# Altium PCB HASEL_Pair_One_Polarity.PcbDoc
Units mil, origin at the board's own origin, x right, y up, seen from the top; angles counter-clockwise.
Board outline 5465 x 4165 mil, 2 copper layers (Top Layer, Bottom Layer); 54 components, 51 nets, 216 pads, 42 vias.
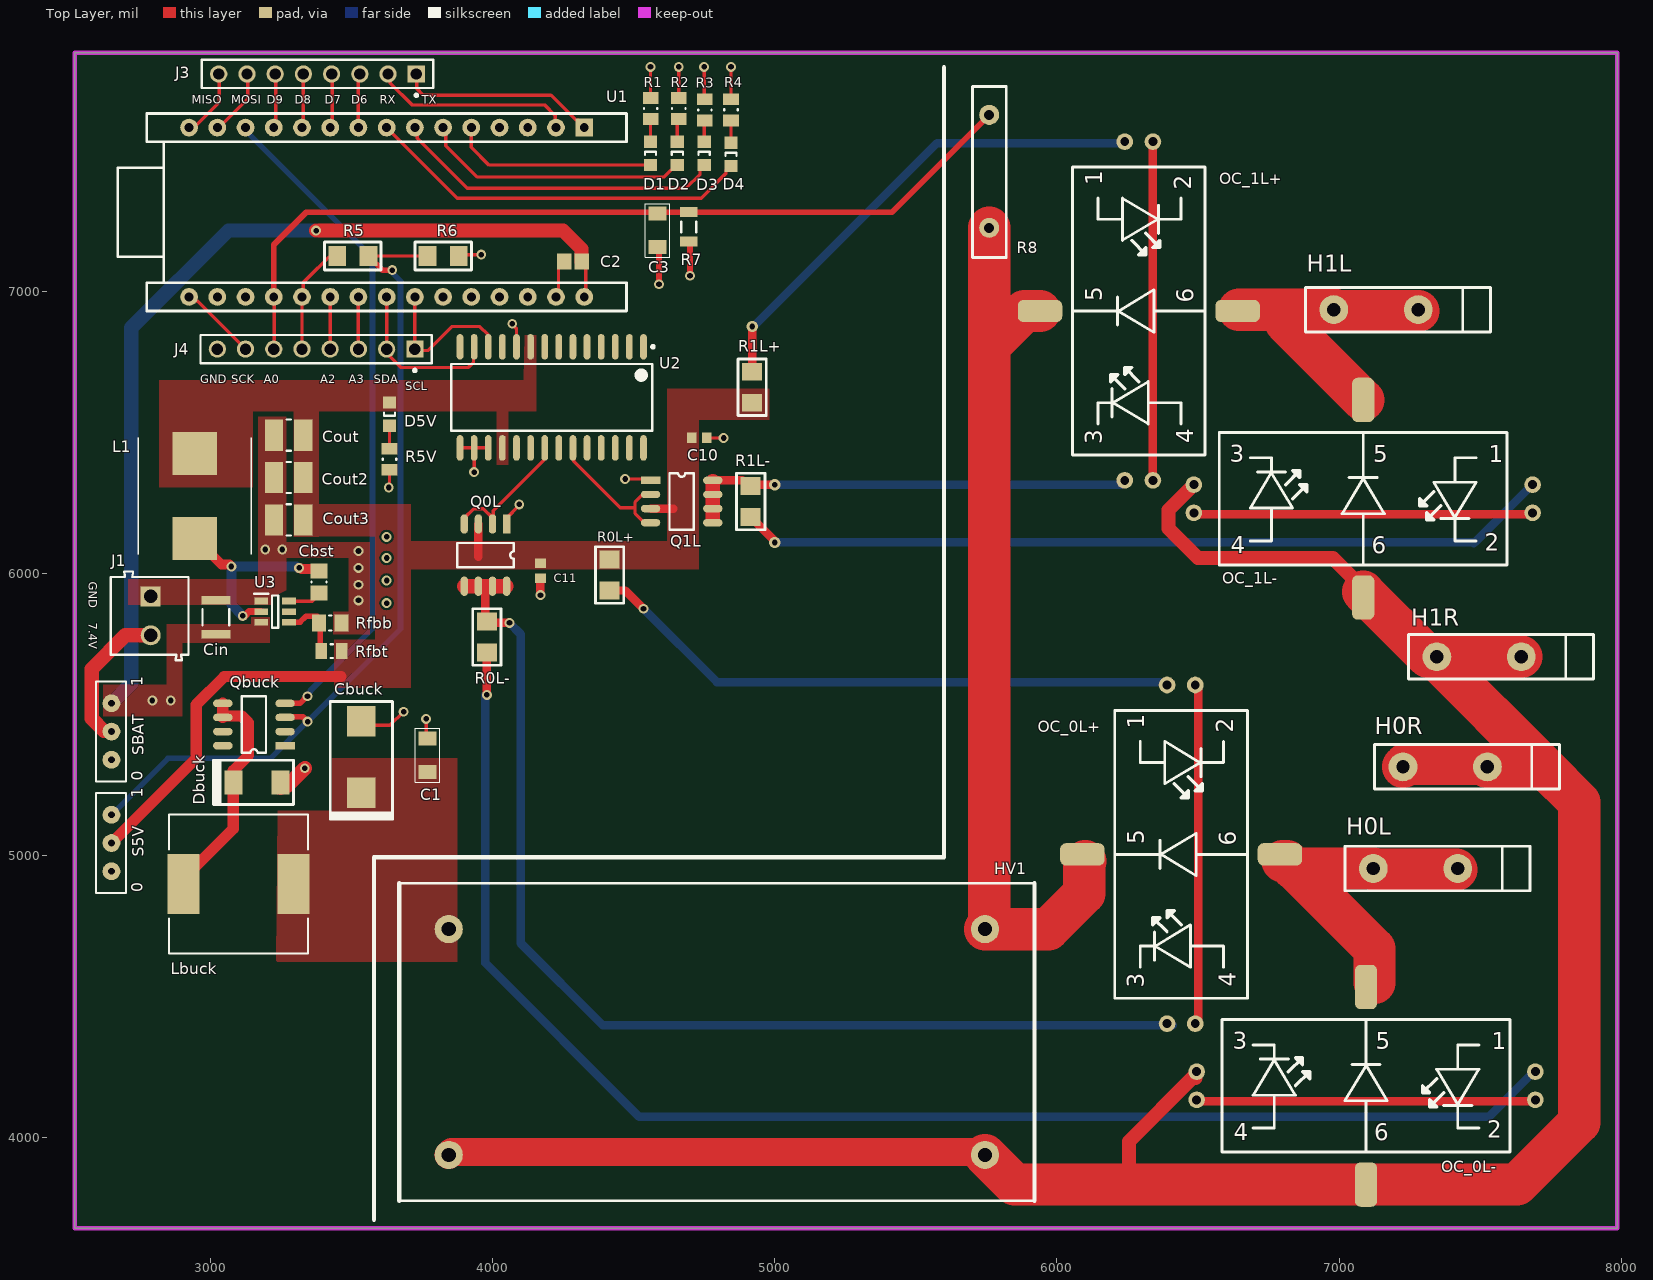
[diagram p0: Top Layer view]
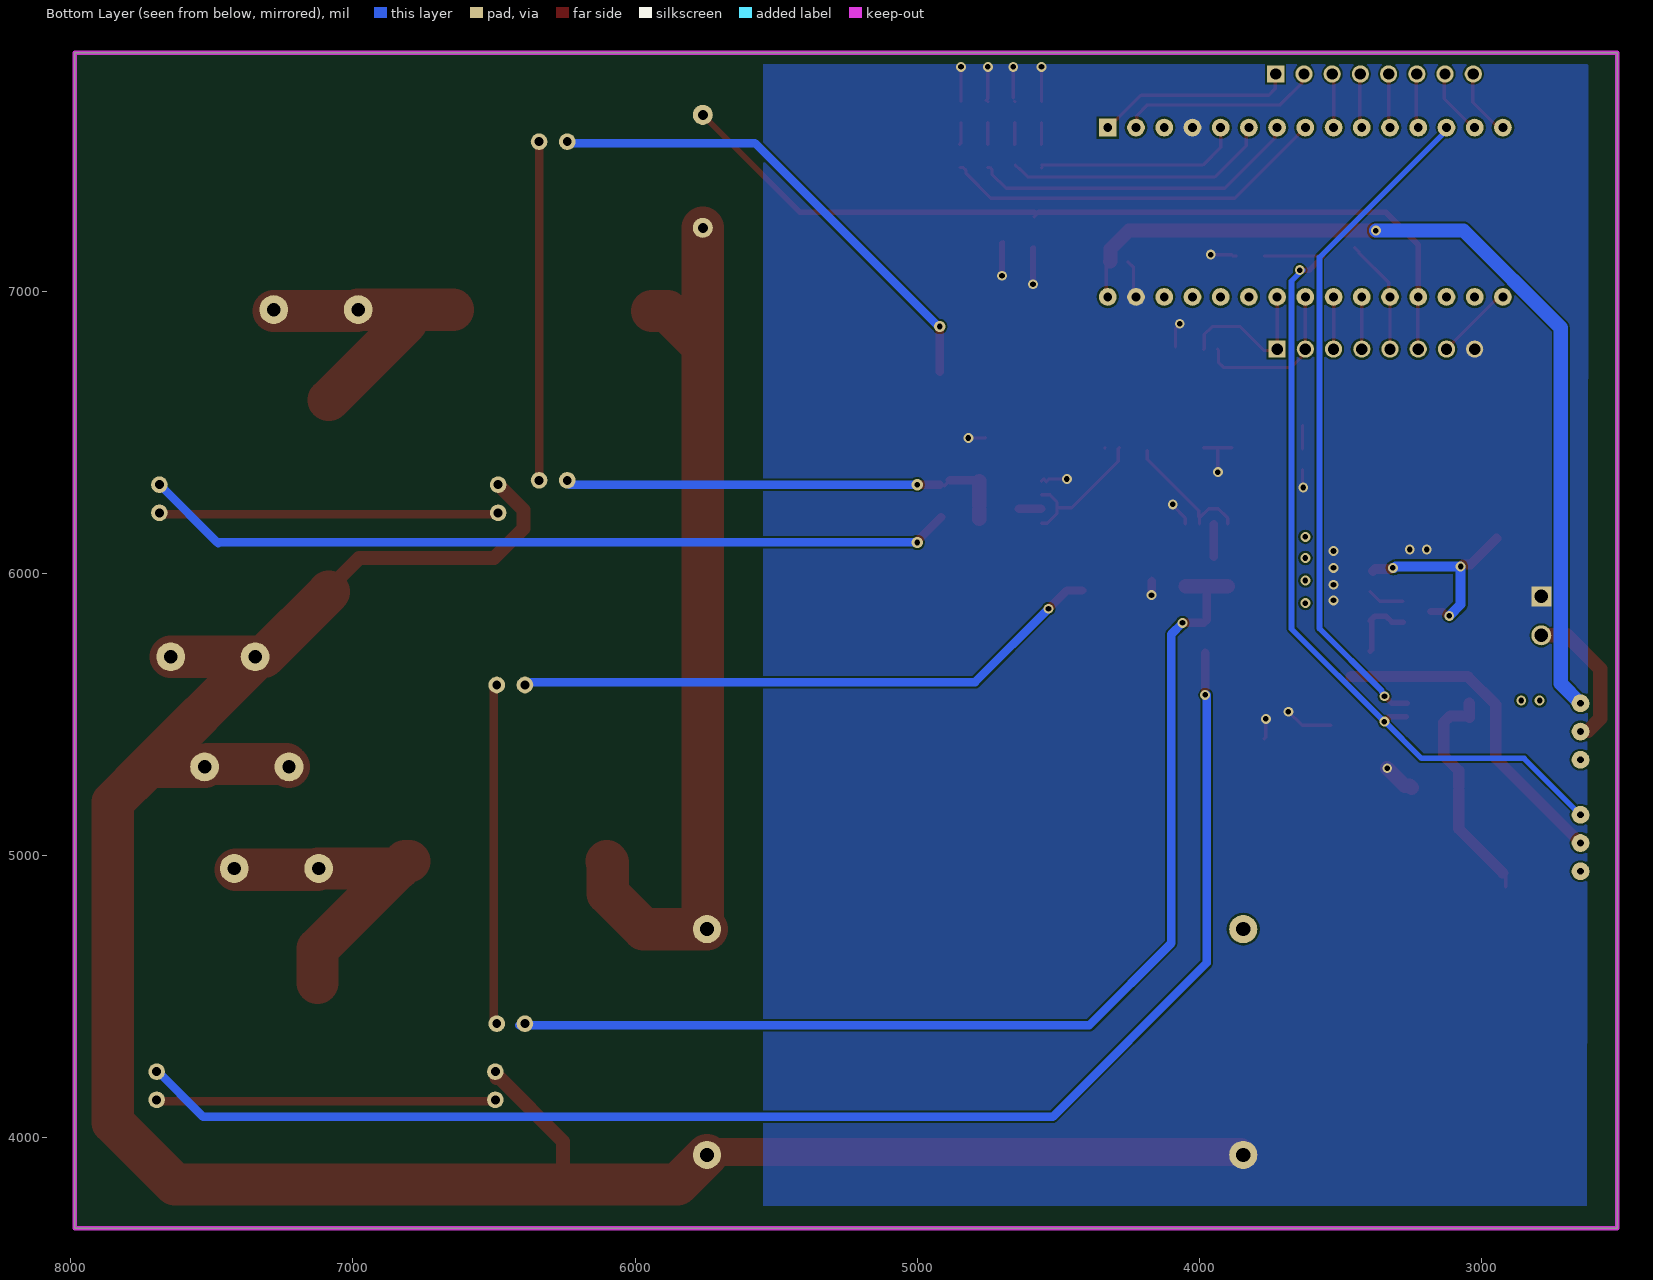
[diagram p1: Bottom Layer view, seen from below]

## Layer stack, top to bottom
Top Solder: solder mask 0.4, Solder Resist, Dk 3.5
Top Layer: signal copper 1.4
Dielectric 1: dielectric 12.6, FR-4, Dk 4.8
Bottom Layer: signal copper 1.4
Bottom Solder: solder mask 0.4, Solder Resist, Dk 3.5

## Board outline
2520,3680 7985,3680 7985,7845 2520,7845

## Design rules (kind name [scope] priority, off if disabled: settings)
Clearance [All] p1: gap=7.5 ignorepadtopadclearanceinfootprint=TRUE
PolygonConnect [All] p1: connectstyle=Direct reliefconductorwidth=10 reliefentries=4 polygonreliefangle="90 Angle" airgapwidth=10
RoutingVias [All] p1: holewidth=28 width=50 viastyle="Through Hole" minholewidth=15 minwidth=25 maxholewidth=28 maxwidth=50
SilkToSilkClearance [All] p1: silktosilkclearance=7
SilkToSolderMaskClearance [IsPad] p1: minsilkscreentomaskgap=6 clearancetoexposedcopper=TRUE
SolderMaskExpansion [All] p1: expansion=4 istentingtop=FALSE
Width [All] p1: maxlimit=200 minlimit=10 preferedwidth=12 minimp=50.000000 maximp=50.000000 favimp=50.000000
28 further rules are at their usual default settings.

## Classes and differential pairs
component class Control: C1 C2 Cbst Cbuck Cin Cout Cout2 Cout3 D1 D2 D3 D4 D5V Dbuck HV1 J1 J3 J4 L1 Lbuck Qbuck R1 R2 R3 R4 R5 R5V R6 Rfbb Rfbt S5V SBAT U1 U2 U3
component class Hbridge0: C3 C10 C11 H0L H0R H1L H1R OC_0L+ OC_0L- OC_1L+ OC_1L- Q0L Q1L R0L+ R0L- R1L+ R1L- R7 R8

## Components (designator, comment, footprint, x,y, rotation, side; value= is the part's Value field where it differs from the comment)
C1 "Capacitor 10uF" "1206 CAP" 3770,5355.94 r270 top value=10uF
C2 "C0805C104K5RACTU" CAPC2013X88X50NL20T25 4285,7105 r0 top
C3 "Capacitor 0.33uF" "1206 CAP" 4585,7215.94 r90 top value=0.33uF
C10 "GRM1885C1H101JA01D" CAPC1608X90X35NL10T15 4732.5,6480.93 r180 top
C11 "GRM1885C1H101JA01D" CAPC1608X90X35NL10T15 4170,6010 r90 top
Cbst "CAP 100nF 50V 0805(2012)" CAPC0805(2012)100_M 3385,5970 r90 top value=100nF
Cbuck "Capacitor 220uF (Polarized)" "SMD 7343 - Pol" 3535,5350 r270 top value=220uF
Cin "GRM32ER61C226KE20L" MURA-1210_H_2.7_L 3020,5845 r270 top
Cout "CL32B106KBJNNWE" FP-CL32-IPC_B 3277.82,6490 r180 top
Cout2 "CL32B106KBJNNWE" FP-CL32-IPC_B 3277.82,6340 r180 top
Cout3 "CL32B106KBJNNWE" FP-CL32-IPC_B 3277.82,6190 r180 top
D1 "150080SS75000" 0805_A 4560,7488.66 r270 top
D2 "150080VS75000" 0805_A 4655,7488.66 r270 top
D3 "150080SS75000" 0805_A 4750,7488.66 r270 top
D4 "150080VS75000" 0805_A 4845,7485 r270 top
D5V "150080VS75000" 0805_A 3635,6565 r90 top
Dbuck "Schottky Diode" "Schottky Diode" 3165,5260 r180 top
H0L "HV Socket" "HV Socket 2mm" 7420,4955 r180 top
H0R "HV Socket" "HV Socket 2mm" 7525,5315 r180 top
H1L "HV Socket" "HV Socket 2mm" 7280,6935 r180 top
H1R "HV Socket" "HV Socket 2mm" 7645,5705 r180 top
HV1 "5VV9 (5W)" 5VV9 3670,3777.5 r0 top
J1 "PWR Terminal Block" 691103110002 2785,5850 r270 top
J3 "PPPC081LFBN-RC" SLIN-PPPC081LFBN-RC_V 3380,7770 r180 top
J4 "PPPC081LFBN-RC" SLIN-PPPC081LFBN-RC_V 3375,6795 r180 top
L1 "7443251600" WE-HCI_105023 2945,6275 r90 top
Lbuck "7447709821" WE-PD-XXL 3100,4900 r0 top
OC_0L+ "OC100HG" OC100G 6440,5005 r180 top
OC_0L- "OC100HG" OC100G 7095,4185 r90 top
OC_1L+ "OC100HG" OC100G 6290,6930 r180 top
OC_1L- "OC100HG" OC100G 7085,6265 r90 top
Q0L "Dual MOSFET" SO-8 4050,6175.47 r270 top
Q1L "Dual MOSFET" SO-8 4560,6330 r0 top
Qbuck "Dual MOSFET" SO-8 3265,5390 r180 top
R0L+ "Resistor" "1206 R" 4415,5939.76 r0 top value=27R
R0L- "Resistor" "1206 R" 3980,5830 r180 top value=27R
R1 "ERJ-6GEYJ161V" RESC0805(2012)_N 4560,7647.6 r270 top value="160.00 Ohm"
R1L+ "Resistor" "1206 R" 4920,6715 r180 top value=27R
R1L- "Resistor" "1206 R" 4915,6310 r180 top value=27R
R2 "ERJ-6GEYJ161V" RESC0805(2012)_N 4660,7647.6 r270 top value="160.00 Ohm"
R3 "ERJ-6GEYJ161V" RESC0805(2012)_N 4752.5,7642.5 r270 top value="160.00 Ohm"
R4 "ERJ-6GEYJ161V" RESC0805(2012)_N 4845,7642.6 r270 top value="160.00 Ohm"
R5 "Resistor" "1206 R" 3560.24,7125 r90 top value=1k
R5V "ERJ-6GEYJ161V" RESC0805(2012)_N 3635,6405 r90 top value="160.00 Ohm"
R6 "Resistor" "1206 R" 3880.24,7125 r90 top value=1k
R7 "ERJ-8ENF8062V" RESC3216X70X50LL05T20 4695,7227.83 r90 top
R8 "Resistor" "HV resistor" 5760,7625 r270 top value=100M
Rfbb "CRCW080513K7FKEA" RESC2013X50X30ML20T20 3425,5825 r180 top
Rfbt "CRCW0805100KFKEA" RESC2013X50X30NL20T20 3430,5725 r0 top
S5V "Slider Switch" "Slide Switch" 2650,5045 r180 top
SBAT "Slider Switch" "Slide Switch" 2650,5440 r180 top
U1 "Arduino Nano" "Arduino Nano" 4125,7580 r270 top
U2 "MCP23017-E/SO" SOIC-SO28_N 4210,6624.13 r270 top
U3 "TPS54308DDCR" SOT95P280X100-6N 3230,5865 r0 top

## Footprints (in the part's own frame and the unit in brackets; to place one, negate y for a bottom-side part, rotate by r counter-clockwise, add the part's x,y. Pads: shape width x height; smd on the part's side, far side on the other; paste and mask are expansions set on the pad)
5VV9 [mil]
  round 100 hole 50: 1(175,962.5) 2(175,162.5) 3(2075,962.5) 4(2075,162.5)
  silkscreen extent 0,0 2250,1125
0805_A [mm] "Chip LED, 2-Leads, Body 2.0x1.3mm, IPC Medium Density"
  rect 1.1x1.2 smd: 1(-1.05,0) 2(1.05,0)
  silkscreen extent -0.15,-0.5 0.15,0.5, body extent -1,-0.62 1,0.63, height 0.68
"1206 CAP" [mm]
  rect 1.25x1.6 smd: 1(-1.5,0) 2(1.5,0)
  silkscreen extent -2.41,-1.1 2.41,1.1, body extent -1.55,-0.8 1.55,0.8, height 1.05
"1206 R" [mm]
  rect 1.8x1.6 smd: 1(0,0) 2(0,2.8)
  silkscreen extent -1.27,-1.14 1.27,3.94, body extent -0.8,-0.4 0.8,3.2, height 0.25
691103110002 [mm] "3,50mm - modular - blue - Horizontal wire entry - Pressure clamp - 8,4mm height - 02p"
  rect 1.8x1.8 hole 1.2: 1(-1.75,0.1)
  round 1.8 hole 1.2: 2(1.75,0.1)
  silkscreen extent -4,-3.5 4,3.5, body extent -4,-3.5 4,3.5, height 8.45
"Arduino Nano" [mm]
  rect 1.6x1.6 hole 0.8: 1(0,5.08)
  round 1.6 hole 0.8: 2(0,2.54) 3(0,0) 4(0,-2.54) 5(0,-5.08) 6(0,-7.62) 7(0,-10.16) 8(0,-12.7) 9(0,-15.24) 10(0,-17.78) 11(0,-20.32) 12(0,-22.86) 13(0,-25.4) 14(0,-27.94) 15(0,-30.48) 16(15.24,5.08) 17(15.24,2.54) 18(15.24,0) 19(15.24,-2.54) 20(15.24,-5.08) 21(15.24,-7.62) 22(15.24,-10.16) 23(15.24,-12.7) 24(15.24,-15.24) 25(15.24,-17.78) 26(15.24,-20.32) 27(15.24,-22.86) 28(15.24,-25.4) 29(15.24,-27.94) 30(15.24,-30.48)
  silkscreen extent -1.27,-36.89 16.51,8.89, body extent -1.4,-34.29 16.51,8.89, height 8.26
CAPC0805(2012)100_M [mm] "Chip Capacitor, Body 2.0x1.2mm, Height 1.0mm, IPC Low Density"
  rect 1.35x1.55 smd: 1(-1,0) 2(1,0)
  silkscreen extent -0.05,-0.67 0.05,0.67, body extent -1.1,-0.72 1.1,0.72, height 1
CAPC1608X90X35NL10T15 [mm] "Chip Capacitor, 2-Leads, Body 1.60x0.80mm, IPC Medium Density"
  rect 0.85x0.95 smd: 1(-0.675,0) 2(0.675,0)
  body extent -0.85,-0.45 0.85,0.45, height 0.9
CAPC2013X88X50NL20T25 [mm] "Chip Capacitor, 2-Leads, Body 2.00x1.25mm, IPC Medium Density"
  rect 1.3x1.45 smd: 1(-0.8,0) 2(0.8,0)
  body extent -1.1,-0.72 1.1,0.72, height 0.88
FP-CL32-IPC_B [mil]
  rect 65.06x110.4 smd paste+0 mask+0: 1(-52.18,0) 2(52.17,0)
  silkscreen extent -8,-55 8,55, body extent -95,-65 95,65, height 10
"HV resistor" [mm]
  round 1.8 hole 0.9 mask+0.102: 1(-0.002,0)
  round 1.8 hole 0.9: 2(10.16,0)
  silkscreen extent -2.54,-1.5 12.83,1.52, body extent -2.54,-1.27 12.83,1.27, height 8.64
"HV Socket 2mm" [mm]
  round 2.6 hole 1.2: 1(0,0) 2(7.6,0)
  silkscreen extent -6.5,-2 10.16,2, body extent -6.4,-2 8.5,2.1, height 6
MURA-1210_H_2.7_L [mm] "Chip Capacitor, 2-Leads, Body 3.5x2.7mm, IPC High Density"
  rect 0.75x2.6 smd: 1(-1.525,0) 2(1.525,0)
  silkscreen extent -0.75,-1.2 0.75,1.2, body extent -1.75,-1.35 1.75,1.35, height 2.7
OC100G [mm]
  round 1.5 hole 0.8: 1(1.27,-15.24) 2(-1.27,-15.24) 3(1.27,15.24) 4(-1.27,15.24)
  rrect50% 4x2 smd: 5(8.89,0) 6(-8.89,0)
  silkscreen extent -5.97,-12.95 5.97,12.95, body extent -9.53,-16.51 9.53,16.51, height 8.13
RESC0805(2012)_N [mm] "Chip Resistor, Body 2.0x1.3mm, IPC Medium Density"
  rect 1.05x1.4 smd: 1(-0.95,0) 2(0.95,0)
  silkscreen extent -0.05,-0.6 0.05,0.6, body extent -1.1,-0.67 1.1,0.68, height 0.7
RESC2013X50X30ML20T20 [mm] "Chip Resistor, 2-Leads, Body 2.00x1.25mm, IPC Low Density"
  rect 1.25x1.55 smd: 1(-1.025,0) 2(1.025,0)
  silkscreen extent -0.1,-0.67 0.1,0.67, body extent -1.1,-0.72 1.1,0.72, height 0.5
RESC2013X50X30NL20T20 [mm] "Chip Resistor, 2-Leads, Body 2.00x1.25mm, IPC Medium Density"
  rect 1.05x1.45 smd: 1(-0.925,0) 2(0.925,0)
  silkscreen extent -0.1,-0.63 0.1,0.63, body extent -1.1,-0.72 1.1,0.72, height 0.5
RESC3216X70X50LL05T20 [mm] "Chip Resistor, 2-Leads, Body 3.20x1.60mm, IPC High Density"
  rect 0.9x1.55 smd: 1(-1.325,0) 2(1.325,0)
  silkscreen extent -0.5,-0.67 0.5,0.67, body extent -1.63,-0.82 1.62,0.82, height 0.7
"Schottky Diode" [mm]
  rect 1.62x2.18 smd: 1(-2.11,0) 2(2.11,0)
  silkscreen extent -3.3,-2 3.9,2
"Slide Switch" [mm]
  round 1.6 hole 0.6: 1(0,2.54) 2(0,0) 3(0,-2.54)
  silkscreen extent -1.3,-4.5 1.4,4.5, body extent -1,-4 4.5,4, height 0.25
SLIN-PPPC081LFBN-RC_V [mm] "THD, 8-Leads, Body 20.82x2.54mm, Pitch 2.54mm"
  rect 1.55x1.55 hole 1.02: 1(-8.89,0)
  round 1.55 hole 1.02: 2(-6.35,0) 3(-3.81,0) 4(-1.27,0) 5(1.27,0) 6(3.81,0) 7(6.35,0) 8(8.89,0)
  silkscreen extent -10.41,-1.27 10.41,2.04, body extent -10.41,-1.27 10.41,1.27, height 8.5
"SMD 7343 - Pol" [mm]
  rect 2.77x2.55 smd: 1(3.22,0) 2(-3.22,0)
  silkscreen extent -5,-2.8 5.6,2.8
SO-8 [mm]
  rect 1.75x0.67 smd: 1(0,0)
  oval 1.75x0.67 smd: 2(0,-1.27) 3(0,-2.54) 4(0,-3.81) 5(5.6,-3.81) 6(5.6,-2.54) 7(5.6,-1.27) 8(5.6,0)
  silkscreen extent 1.71,-4.44 3.89,0.64
SOIC-SO28_N [mm] "SOIC, 28-Leads, Body 17.9x7.5mm, Pitch 1.27mm, IPC Medium Density"
  oval 2.3x0.6 smd: 1(-4.55,8.255) 2(-4.55,6.985) 3(-4.55,5.715) 4(-4.55,4.445) 5(-4.55,3.175) 6(-4.55,1.905) 7(-4.55,0.635) 8(-4.55,-0.635) 9(-4.55,-1.905) 10(-4.55,-3.175) 11(-4.55,-4.445) 12(-4.55,-5.715) 13(-4.55,-6.985) 14(-4.55,-8.255) 15(4.55,-8.255) 16(4.55,-6.985) 17(4.55,-5.715) 18(4.55,-4.445) 19(4.55,-3.175) 20(4.55,-1.905) 21(4.55,-0.635) 22(4.55,0.635) 23(4.55,1.905) 24(4.55,3.175) 25(4.55,4.445) 26(4.55,5.715) 27(4.55,6.985) 28(4.55,8.255)
  silkscreen extent -4.67,-9.05 3,9.23, body extent -3.8,-9.05 3.8,9.05, height 2.65
SOT95P280X100-6N [mm]
  rect 1.25x0.6 smd: 1(-1.25,0.95) 2(-1.25,0) 3(-1.25,-0.95) 4(1.25,-0.95) 5(1.25,0) 6(1.25,0.95)
  silkscreen extent -1.88,-1.45 0.28,1.6, body extent -1.4,-1.45 1.4,1.45, height 1
WE-HCI_105023 [mm]
  rect 3.85x4 smd: 1(-3.825,0) 2(3.825,0)
  silkscreen extent -5.25,-5.1 5.25,5.1
WE-PD-XXL [mm] "SMD Inductor, 2-Leads, Body 12.0 x 12.0 mm"
  rect 2.9x5.4 smd: 1(-4.95,0) 2(4.95,0)
  silkscreen extent -6.25,-6.25 6.25,6.25, body extent -6,-6 6,6, height 10.36

## Part data
C1: "1276-3038-6-ND / Manufacturer: CL31A106KAHNFNE"
C2: library part CMP-2007-00279-1, Manufacturer=Kemet, Part Number=C0805C104K5RACTU
C3: "‎399-1285-1-ND‎ Manufacturer: ‎C1206C334K3RACTU‎"
C10 C11: library part CMP-2006-02595-1, Manufacturer=Murata, Part Number=GRM1885C1H101JA01D
Cbst: library part CMP-1036-04423-1, "CAP 100nF 50V ±20% 0805 (2012 Metric) Thickness 1mm SMD", Case-EIA=0805, Case-Metric=2012, Rated Voltage="50 V", Tolerance=Â±20%, Max Thickness="1 mm", Technology=SMT
Cbuck: "Digikey: ‎399-8415-1-ND‎ / Manufacturer: ‎T491X227K016AT‎", LatestRevisionDate=17-Jul-2002, LatestRevisionNote="Re-released for DXP Platform.", PackageDescription="Polarized Capacitor (Radial); 2 Leads", PackageReference=RB7.6-15, Published=8-Jun-2000, Publisher="Altium Limited"
Cin: library part CMP-2000-06361-1, "Chip Monolithic Ceramic Capacitor, 22 uF, +/- 10%, -55 to 85 degC, 2-Pin SMD (1210), RoHS, Tape and Reel", Capacitance=22µF, Manufacturer=Murata, Operating Temperature=-55°C~85°C, Package / Case=1210(3225Metric), Package Description="2-Pin Surface Mount Device, Body 3.2 x 2.5 mm", Package Reference=1210, Ratings=-, Standard Package=1,000, Temperature Coefficient=X5R, Tolerance=±10%, Voltage - Rated=16V, Applications=GeneralPurpose, Catalog Drawings=GRMSeries_1210_2.5, Category=Capacitors, Datasheet URL=https://datasheet.ciiva.com/26915/getdatasheetpartid-88858-26915376.pdf, Datasheet Version=05/2014, Family=CeramicCapacitors, Featured Product=GA3SafetyRecognizedCapsandHi-CapMLCC, Features=-, Height - Seated (Max)=-, Lead Spacing=-, Lead Style=-, Manufacturer URL=http://www.murata.com/, Mounting Technology=SurfaceMount, Mounting Type=SurfaceMount,MLCC, Online Catalog=GRMSeries, Other Names=490-1882-2, Packaging=Tape&Reel(TR), Product Training Modules=High-CapMultilayerCeramicCapacitors, Series=GRM, Size / Dimension="0.126\"Lx0.098\"W(3.20mmx2.50mm)", Thickness (Max)="0.106\"(2.70mm)", Voltage Rating Dc=16V
Cout Cout2 Cout3: library part CMP-13271-004028-1, "Cap Ceramic 10uF 50V X7R ±10% SMD 1210 +125°C Embossed T/R", Capacitance=10uF, Case Code (Imperial)=1210, Case Code (Metric)=3225, Dielectric=X7R, Max Operating Temperature=125°C, Min Operating Temperature=-55°C, Package Quantity=1, Tolerance=10%, Voltage Rating=50V, Case/Package=1210, Lead Free="Lead Free", Length=0.126inch, Mount="Surface Mount", Packaging="Tape and Reel", Thickness=0.106inch, Width=0.098inch
D1 D3: library part CMP-1426-00010-1, "SMD mono-color Chip LED, WL-SMCW, Super Red", Color="Super Red", Manufacturer="Wuerth Elektronik", ComponentLink1Description="Manufacturer URL", ComponentLink1URL=http://www.we-online.com, ComponentLink2Description=Datasheet, ComponentLink2URL=http://katalog.we-online.com/led/datasheet/150080SS75000.pdf, PackageReference=0805_A, PartNumber=150080SS75000
D2 D4 D5V: library part CMP-1426-00009-1, "SMD mono-color Chip LED, WL-SMCW, Bright Green", Color="Bright Green", Manufacturer="Wuerth Elektronik", ComponentLink1Description="Manufacturer URL", ComponentLink1URL=http://www.we-online.com, ComponentLink2Description=Datasheet, ComponentLink2URL=http://katalog.we-online.com/led/datasheet/150080VS75000.pdf, PackageReference=0805_A, PartNumber=150080VS75000
H0L H0R H1L H1R: "Black: 486-3654-ND / Red: ‎486-3655-ND‎"
HV1: library part 5VV9
J1: library part CMP-1502-03254-1, "Series 1031 - 3.50 mm Horizontal Entry Modular with Pressure Clamp WR-TBL, 2 pin", Manufacturer="Wurth Elektronik", Operating Temperature=-40to105degC, Package Reference=691103110002, Datasheet URL=http://katalog.we-online.de/em/datasheet/6911031100xx.pdf, Manufacturer URL=http://www.we-online.de, Mounting Technology=THT, Packaging=Box, Part Number=691103110002, Pin Number=2, Pitch=3.50mm, Publisher=WurthElektronik
J3 J4: library part CMP-1770-00002-1, "Female Header, Pitch 2.54 mm, 1 x 8 Position, Height 8.5 mm, Tail Length 3.2 mm, -40 to 105 degC, RoHS, Bulk", Case\Package=TO-252-3, Input Capacitance="350 pF", Max Operating Temperature="150 degC", Max Power Dissipation="2.5 W", Min Operating Temperature="-55 degC", Package Quantity=2500, ComponentLink1Description=Datasheet, ComponentLink1URL=http://sullinscorp.com/catalogs/101_PAGE114-115_.100_FEMALE_HDR.pdf, DatasheetVersion=Jan-15, Elements=1, Height="2.39 mm", Length="6.73 mm", Mount="Surface Mount", PackageDescription="Female Header, Pitch 2.54 mm, 1 x 8 Position, Height 8.5 mm, Tail Length 3.2 mm", PackageReference=PPPC081LFBN-RC, Packaging="Tape and Reel", Pins=3, Radiation Hardening=No, Rds On Max="115 mohm", REACH SVHC="No SVHC", RoHSCompliant=true, Typical Rise Time="90 ns", Width="6.22 mm"
L1: "Inductor", Manufacturer_Name="Wurth Elektronik", Mouser Part Number=710-7443251600, Manufacturer_Part_Number=7443251600, Mouser Price/Stock=https://www.mouser.co.uk/ProductDetail/Wurth-Elektronik/7443251600?qs=VxkwJfKV0FSkbbPOgC7FsA%3D%3D
Lbuck: library part CMP-0227-00163-1, "SMD-Shielded Power Inductor WE-PD, L = 820 µH", Inductance="820 ÂµH", ComponentLink1Description="Manufacturer Link", ComponentLink1URL=http://www.we-online.com, ComponentLink2Description=Datasheet, ComponentLink2URL=http://www.we-online.de/katalog/media/pdf/7447709821.pdf, DatasheetVersion="ver 1, Jan-2007", PackageDescription="SMD Inductor, 2-Leads, Body 12.0 x 12.0 mm", PackageReference=WE-PD-XXL, PackageVersion=2004
R0L+ R0L- R1L+ R1L-: library part "Resistor 27R", "Manufacturer ‎HRG3216Q-27R0-D-T1‎ / Digikey ‎408-1908-1-ND"
R1 R2 R3 R4 R5V: library part CMP-1013-00055-1, "160R 0.125W 5% 0805 (2012 Metric)  SMD", Case-EIA=0805, Case-Metric=2012, Power="0.125 W", Tolerance="5 %", Technology=SMT
R5 R6: library part "Resistor 1k", "‎541-2245-1-ND‎ / Manufacturer: ‎RCA12061K00FKEA‎"
R7: library part CMP-2003-00504-1, Manufacturer=Panasonic, Part Number=ERJ-8ENF8062V
R8: library part "Resistor 100M", "Digikey:‎SM102031006FE-ND‎ / Manufacturer: ‎SM102031006FE-ND‎"
Rfbb: library part CMP-2001-04947-1, Manufacturer="Vishay Dale", Part Number=CRCW080513K7FKEA
Rfbt: library part CMP-2001-04899-1, Manufacturer="Vishay Dale", Part Number=CRCW0805100KFKEA
S5V SBAT: library part Switch-SPST, "Digikey: ‎563-1571-ND‎ / Manufacturer:‎ MHS122-1‎", LatestRevisionDate=17-Jul-2002, LatestRevisionNote="Re-released for DXP Platform.", PackageDescription="Switch; 2 Leads", PackageReference=SPST-2, Published=24-Mar-1999, Publisher="Altium Limited"
U2: library part CMP-0186-00161-2, "16-Bit I/O Expander with Serial Interface, 28-Pin SOIC, Extended Temperature", Code_JEDEC=MS-013, ComponentLink1Description="Manufacturer URL", ComponentLink1URL=http://www.microchip.com/, ComponentLink2Description=Datasheet, ComponentLink2URL=http://ww1.microchip.com/downloads/en/DeviceDoc/21952b.pdf, ComponentLink3Description="Package Specification", ComponentLink3URL=http://www.microchip.com/stellent/groups/techpub_sg/documents/packagingspec/en012702.pdf, DatasheetVersion="revB, Feb-2007", PackageDescription="28-Lead Plastic Small Outline (SO) - Wide 7.50mm Body [SOIC]", PackageReference=SOIC-SO28, PackageVersion="revBB, Aug-2009", RevisionNote="URLs added."
U3: "Power Supply", Manufacturer_Name="Texas Instruments", Mouser Part Number=595-TPS54308DDCR, Arrow Part Number=TPS54308DDCR, Arrow Price/Stock=https://www.arrow.com/en/products/tps54308ddcr/texas-instruments, Datasheet Link=http://www.ti.com/lit/gpn/tps54308, Height=1mm, Manufacturer_Part_Number=TPS54308DDCR, Mouser Price/Stock=https://www.mouser.co.uk/ProductDetail/Texas-Instruments/TPS54308DDCR?qs=gt1LBUVyoHl9iRtozvTSQw%3D%3D

## Via types
v1: diameter 35, hole 20, Top Layer to Bottom Layer, 39 vias
v2: diameter 40, hole 20, Top Layer to Bottom Layer, 3 vias

## Nets (pads, with @x,y where several pads share a name; then routed paths per layer and width w, separated by ;. In a path a pad name is that pad's centre, name@x,y a point inside that pad or via, vN(x,y) a via of type N, cw(c..) or ccw(c..) an arc to the next point about the centre after c; other vN are vias at no path point)
5V: C10.2 C11.2 Cout2.1 Cout3.1 Cout.1 D5V.2 L1.2 Q0L.3 Q1L.3 R0L+.2 R1L+.2 Rfbt.2 S5V.2 U2.9 U2.18 | length 1364.3
  Top Layer w30: 3950,6060 Q0L.3 ; Q1L.3 4640,6230
  Top Layer w40: S5V.2 2950,5345 2950,5535 3050,5635 3463.19,5635
7.4V: C2.2 Cin.2 SBAT.3 U1.16 U3.3 | length 3300.9
  Top Layer w12: C2.2 4330,7091.5 U1.16@4330,6980
  Top Layer w50: v1(3375,7215) 4250.45,7215 4315.91,7149.54 4315.91,7105.59 C2.2
  Bottom Layer w50: SBAT.3 2720,5610 2720,6870.94 3064.06,7215 v1(3375,7215)
  other v1: 2795,5550 2860,5550
A0: C3.2 J4.6 R7.2 R8.1 U1.27 | length 3083.3
  Top Layer w12: U1.27@3227.4,6965 3227.4,6915 3227.4,6802.6 J4.6@3230,6800 ; C3.2@4569.06,7280 C3.2@4585,7264.06
  Top Layer w20: U1.27 3224.97,7164.97 3340,7280 C3.2@4569.06,7280 ; C3.2@4585,7280 R7.2 5414.91,7280 R8.1
A1: J4.5 R5.2 U1.26 | length 409.7
  Top Layer w12: J4.5 U1.26 ; U1.26@3330,6980 3330,7031.06 3435,7136.06 3435,7140 R5.2@3450,7155
A2: J4.4 U1.25 | length 183.5
  Top Layer w12: U1.25 3425,6802.65 3427.65,6800 J4.4@3430,6800
A3: J4.3 U1.24 | length 186.4
  Top Layer w12: J4.3@3525,6793.59 U1.24
A6: U1.21
D6: J3.3 U1.9 | length 180
  Top Layer w12: U1.9 J3.3@3525,7760
D7: J3.4 U1.10 | length 175
  Top Layer w12: U1.10@3432.4,7585 J3.4@3432.4,7760
D8: J3.5 U1.11 | length 197.1
  Top Layer w12: U1.11 3330,7585 J3.5@3330,7775
D9: J3.6 U1.12 | length 175
  Top Layer w12: U1.12@3232.4,7585 J3.6@3232.4,7760
GND: C1.1 C2.1 C3.1 C10.1 C11.1 Cbuck.2 Cin.1 Cout2.2 Cout3.2 Cout.2 Dbuck.1 H0R.1 H0R.2 H1R.1 H1R.2 HV1.2 HV1.4 J1.1 J4.8 OC_0L-.3 OC_0L-.6 OC_1L-.3 OC_1L-.6 Q0L.1 Q1L.1 R1.1 R2.1 R3.1 R4.1 R5V.1 R6.1 R7.1 Rfbb.1 U1.4 U1.17 U2.10 U2.15 U2.16 U2.17 U3.1 | length 10656
  Top Layer w12: Cbuck.2@3535,5461.77 3636.77,5461.77 v1(3685,5510) ; v1(3632.5,6305) 3635,6307.5 R5V.1 ; v1(3765,5485) 3765,5420 C1.1 ; R6.1@3870,7125 R6.1 3885.24,7130 v1(3960,7130) ; U2.15 U2.16 ; v1(3935,6359.13) U2.16 ; U2.17 U2.16 ; Q0L.1 4050,6196.73 4095,6241.73 v1(4095,6245) ; v1(4070,6885) 4070,6881.54 4085,6866.54 U2.10 ; C11.1@4170,5973.43 4165,5978.43 C11.1 ; U1.17@4230,6980 4233.91,6983.91 4233.91,7085.41 C2.1 ; v1(4470,6335) 4532.5,6335 4542.5,6325 4552.5,6335 Q1L.1@4560,6327.5 ; R1.1@4560,7672.4 R1.1 v1(4560,7795) ; C3.1 C3.1@4590,7151.89 ; R2.1 v1(4660,7795) ; R7.1 R7.1@4700,7170.67 ; v1(4750,7795) 4750,7682.4 R3.1@4755,7677.4 ; C10.1 4760,6480 v1(4818.78,6480) v1@4823.78,6485 ; R4.1@4845,7672.4 v1(4845,7795) ; OC_1L-.6@7059.25,5972.71 OC_1L-.6@7103.34,5972.71 ; OC_0L-.6@7095,3815 OC_0L-.6 OC_0L-.6@7095,3854.37
  Top Layer w20: v1(4590,7025) C3.1@4590,7151.89 ; v1(4700,7055) R7.1@4700,7170.67
  Top Layer w30: v1(4170,5923.43) C11.1@4170,5973.43
  Top Layer w50: Dbuck.1@3248.07,5241.02 3254.96,5247.91 3272.91,5247.91 v1(3335,5310) ; 6255,3815 6255,3835 6255,3987.92 6480.34,4213.27 6490.82,4213.27 OC_0L-.3@6490.82,4215 ; OC_1L-.3 6395,6225 6395,6160 6500,6055 6976.96,6055 OC_1L-.6@7059.25,5972.71
  Top Layer w100: HV1.2 3855,3950 HV1.4@5760,3950
  Top Layer w150: HV1.4 5850,3835 6255,3835 ; 6275,3835 OC_0L-.6 7630,3835 7850,4055 7850,5190 7724.78,5315.22 ; OC_1L-.6@7085,5935 7315,5705 H1R.2 ; H0R.2 7236.01,5325.22 7514.78,5325.22 H0R.1 7525.22,5315.22 7724.78,5315.22 ; H1R.1 H1R.2 ; H1R.2 7345.79,5694.21 7724.78,5315.22
  other v1: 3525,5905 3525,5960 3525,6020 3525,6080 3195,6085 3255,6085
HV: HV1.3 OC_0L+.5 OC_1L+.5 R8.2 | length 3235.6
  Top Layer w150: R8.2 5760,6820 ; OC_1L+.5 5885,6930 5775,6820 5760,6820 ; OC_0L+.5@6100,4980 6096.26,4976.26 6096.26,4866.26 5970,4740 HV1.3 5760,4755 5760,6820
HV_Conv_In: C1.2 Cbuck.1 HV1.1 Lbuck.2
Left_0: Q0L.2 Q0L.4 U2.21 | length 485.3
  Top Layer w12: Q0L.4 3900,6196.73 3933.27,6230 3967.97,6230 Q0L.2@4000,6197.97 ; Q0L.2 Q0L.2@4000,6197.97 ; U2.21@4185,6435.87 4185,6405 4002.75,6222.75 4002.75,6200.72 Q0L.2@4000,6197.97
Left_1: Q1L.2 Q1L.4 U2.23 | length 511.4
  Top Layer w12: U2.23 4287.22,6442.78 4287.22,6397.78 4451.98,6233.02 4505,6233.02 ; Q1L.2@4531.35,6279.88 Q1L.2@4530.6,6279.13 ; Q1L.4@4560,6177.5 4540,6177.5 4505,6212.5 4505,6233.02 ; Q1L.2@4560,6279.13 Q1L.2@4530.6,6279.13 ; 4505,6233.02 4505,6253.53 Q1L.2@4530.6,6279.13
MISO: J3.8 U1.15 | length 231.4
  Top Layer w12: U1.15@2932.4,7570 3032.4,7670 J3.8@3032.4,7760
MOSI: J3.7 U1.14 | length 222.4
  Top Layer w12: U1.14@3030,7580 3132.4,7682.4 J3.7@3132.4,7760
NetCbst_1: Cbst.1 U3.6 | length 128.9
  Top Layer w12: U3.6 3361.14,5902.4 Cbst.1@3394.37,5935.63
NetD1_1: D1.1 R1.2 | length 77.6
  Top Layer w12: D1.1@4560,7520 R1.2@4560,7597.6
NetD1_2: D1.2 U1.5 | length 732.2
  Top Layer w12: U1.5 3925,7510 3987.68,7447.32 D1.2 ; D1.2@4558.79,7437.32 D1.2@4560,7437.32
NetD2_1: D2.1 R2.2 | length 77.6
  Top Layer w12: D2.1@4655,7520 R2.2@4655,7597.6
NetD2_2: D2.2 U1.6 | length 950.3
  Top Layer w12: U1.6 3834.76,7570.24 3834.76,7515.24 3945,7405 4609.05,7405 4635.72,7431.67 4637.38,7431.67 D2.2@4653.03,7447.32
NetD3_1: D3.1 R3.2 | length 76.3
  Top Layer w12: D3.1@4750,7521.34 R3.2@4750,7597.6
NetD3_2: D3.2 U1.7 | length 1171.7
  Top Layer w12: U1.7 3733,7572 3733,7542 3910,7365 4685,7365 4735.3,7415.3 4735.3,7431.67 4742.29,7438.66 D3.2@4750,7438.66
NetD4_1: D4.1 R4.2 | length 78.3
  Top Layer w12: R4.2@4845,7597.6 D4.1 D4.1@4850,7521.34
NetD4_2: D4.2 U1.8 | length 1377.8
  Top Layer w12: U1.8 3875,7330 4740,7330 4827.38,7417.38 4827.38,7428.01 4838.03,7438.66 D4.2@4848.03,7438.66
NetD5V_1: D5V.1 R5V.2 | length 81.3
  Top Layer w12: R5V.2 D5V.1
NetDbuck_2: Dbuck.2 Lbuck.1 Qbuck.5 Qbuck.6 | length 806
  Top Layer w12: Lbuck.1@2915.12,4890 Lbuck.1@2915.12,4939.21
  Top Layer w40: Lbuck.1@2925.12,4939.21 3081.93,5096.02 Dbuck.2@3081.93,5230 ; Qbuck.6 3049.53,5495 3111.57,5495 3135,5471.57 3135,5354.88 3081.93,5301.81 Dbuck.2@3081.93,5244.88 ; Qbuck.5 3044.53,5490.42 Qbuck.6@3044.94,5490
NetH0L_1: H0L.1 H0L.2 OC_0L+.6 OC_0L-.5 | length 1201.1
  Top Layer w12: OC_0L-.5@7095,4515 OC_0L-.5@7095,4554.37
  Top Layer w100: H0L.2 7121.43,4955 H0L.2@7126.43,4950 ; H0L.1@7414.36,4950 7419.36,4955 H0L.1
  Top Layer w150: OC_0L+.6@6800,4980 6815,4980 7125,4670 OC_0L-.5@7125,4550 ; 6836.9,4955 H0L.2@7121.88,4955 ; H0L.2@7126.43,4950 H0L.1@7414.36,4950
NetH1L_1: H1L.1 H1L.2 OC_1L+.6 OC_1L-.5 | length 1110.3
  Top Layer w12: OC_1L+.6 6645,6930 OC_1L+.6@6679.37,6930
  Top Layer w150: OC_1L+.6@6645,6935 6810,6935 ; OC_1L-.5 6810,6890 6810,6935 ; H1L.1@7280,6930 6985.79,6930 H1L.2 6810,6935
NetJ1_2: J1.2 SBAT.2 | length 508.5
  Top Layer w50: SBAT.2 2647.51,5442.49 2623.3,5442.49 2580,5485.79 2580,5662.17 2698.94,5781.1 J1.2@2773.94,5781.1
NetOC_0L+_1: OC_0L+.1 R0L+.1 | length 2122.1
  Top Layer w30: R0L+.1 4470.24,5939.76 v1(4535,5875)
  Bottom Layer w30: v1(4535,5875) 4795,5615 6369.45,5615 6373.9,5610.56 6394.46,5610.56 OC_0L+.1@6398.9,5615
NetOC_0L+_2: OC_0L+.2 OC_0L+.4 | length 1204
  Top Layer w30: OC_0L+.4@6500,4405 6500,5605 OC_0L+.2@6500,5608.95
NetOC_0L+_3: OC_0L+.3 Q0L.5 Q0L.6 Q0L.7 Q0L.8 R0L-.1 | length 3940.3
  Top Layer w12: R0L-.1@3975,5835 R0L-.1@3985,5825
  Top Layer w30: R0L-.1@3975,5835 3975,5955 ; R0L-.1@3985,5825 v1(4060,5825)
  Top Layer w50: Q0L.5 Q0L.6 3975,5955 Q0L.7 Q0L.8
  Bottom Layer w30: v1(4060,5825) 4100,5785 4100,4690 4390,4400 OC_0L+.3@6409.45,4400
NetOC_0L-_1: OC_0L-.1 R0L-.2 | length 5119.6
  Top Layer w30: v1(3980,5570) R0L-.2
  Bottom Layer w30: v1@3975,5570 3975,4620 4520,4075 7530,4075 OC_0L-.1@7699.07,4244.07
NetOC_0L-_2: OC_0L-.2 OC_0L-.4 | length 1204.1
  Top Layer w30: OC_0L-.4 6500,4130 7690,4130 OC_0L-.2
NetOC_1L+_1: OC_1L+.1 R1L+.1 | length 1725.4
  Top Layer w30: R1L+.1 v2(4920,6875)
  Bottom Layer w30: v2(4920,6875) 4922.71,6875 4927.71,6880 4930,6880 5575,7525 OC_1L+.1@6216.2,7525
NetOC_1L+_2: OC_1L+.2 OC_1L+.4 | length 1200
  Top Layer w30: OC_1L+.4 OC_1L+.2
NetOC_1L+_3: OC_1L+.3 Q1L.5 Q1L.6 Q1L.7 Q1L.8 R1L-.1 | length 1582.4
  Top Layer w12: Q1L.6@4780.47,6227.5 Q1L.6 Q1L.6@4780.47,6242.5 ; Q1L.7@4780.47,6277.5 Q1L.7 Q1L.7@4780.47,6292.5 ; Q1L.8 4780.47,6327.5 Q1L.8@4782.97,6330 ; R1L-.1@4885,6330 R1L-.1@4905,6310
  Top Layer w30: Q1L.8@4782.97,6330 R1L-.1@4885,6330 ; R1L-.1@4920,6315 v2(5000,6315)
  Top Layer w50: Q1L.5@4780.47,6192.5 Q1L.6@4780.47,6227.5 ; Q1L.6@4780.47,6242.5 Q1L.7@4780.47,6277.5 ; Q1L.7@4780.47,6292.5 Q1L.8@4780.47,6327.5
  Bottom Layer w30: v2(5000,6315) OC_1L+.3@6231.05,6315
NetOC_1L-_1: OC_1L-.1 R1L-.2 | length 2898.9
  Top Layer w12: R1L-.2 R1L-.2@4915.24,6200
  Top Layer w30: R1L-.2@4915.24,6200 5000,6115.24 v2(5000,6110)
  Bottom Layer w30: v2(5000,6110) 7480,6110 ; 7477.5,6107.5 7480,6110 ; OC_1L-.1 7480,6110
NetOC_1L-_2: OC_1L-.2 OC_1L-.4 | length 1200
  Top Layer w30: OC_1L-.4@6485,6210 OC_1L-.2@7685,6210
NetQbuck_3: Qbuck.3 R5.1 R6.2 S5V.3 | length 2987.6
  Top Layer w12: Qbuck.3 Qbuck.3@3267.5,5492.5 ; R5.1@3577.94,7107.3 R5.1 R6.2
  Top Layer w20: Qbuck.3@3267.5,5492.5 3327.5,5492.5 v1(3345,5475) ; R5.1@3577.94,7107.3 3610.24,7075 v1(3645,7075)
  Bottom Layer w20: S5V.3 2850,5345 3213.6,5345 3347.43,5478.83 3348.83,5478.83 3674,5804 3674,7036 v1@3635,7075
NetRfbb_2: Rfbb.2 Rfbt.1 U3.4 | length 245.1
  Top Layer w20: U3.4 3318.31,5827.6 3339.17,5848.46 3379.17,5848.46 Rfbb.2@3395,5832.64 ; Rfbb.2@3390.83,5836.81 3390,5835.98 3390,5729.65 Rfbt.1@3394.65,5725
PWM: Qbuck.4 U1.13 | length 2383.2
  Top Layer w12: v1@3342.45,5565 v1(3344.53,5565)
  Top Layer w20: Qbuck.4 3317.45,5540 v1@3342.45,5565
  Bottom Layer w20: U1.13 3125,7570 3575,7120 3575,5805 3354.53,5584.53 3354.53,5580.41 3346.09,5571.97 v1@3341.97,5571.97
RX: J3.2 U1.2 | length 701.2
  Top Layer w12: J3.2@3629.66,7760 3637.3,7752.35 3637.3,7737.7 3715,7660 4185,7660 4222.64,7622.36 U1.2@4222.64,7579.76
SCK: J4.7 U1.30 | length 279.6
  Top Layer w12: U1.30 2938.8,6980 2954.3,6964.5 2955.5,6964.5 3030,6890 3120,6800 J4.7@3130,6800
SCL: J4.1 U1.22 U2.12 | length 549.7
  Top Layer w12: U1.22 3725,6805 3730,6800 J4.1 3730,6790 3770,6790 3855,6875 3955,6875 3982.78,6847.22 3982.78,6796.36 U2.12@3985,6794.13
SDA: J4.2 U1.23 U2.13 | length 566.6
  Top Layer w12: J4.2@3625,6780 3675,6730 3915,6730 3932.78,6747.78 3932.78,6791.91 U2.13@3935,6794.13 ; U1.23 3625,6802.65 3627.65,6800 J4.2@3630,6800
SW: Cbst.2 L1.1 U3.2 | length 759.4
  Top Layer w12: L1.1 L1.1@2947.95,6124.41 ; v1@3067.73,6032.27 v1(3075,6025) ; v1(3115,5850) v1@3122.58,5850 ; U3.2 U3.2@3186.6,5870.81
  Top Layer w25: v1@3122.58,5850 3137.58,5865 U3.2
  Top Layer w35: L1.1@2947.95,6124.41 3040.09,6032.27 v1@3067.73,6032.27 ; v1(3315,6020) 3319.06,6020 3323.4,6015.65 3378.72,6015.65 Cbst.2
  Bottom Layer w35: v1(3115,5850) 3075,5890 v1(3075,6025) 3305.94,6025 3310.94,6020 v1(3315,6020)
TX: J3.1 U1.1 | length 703.5
  Top Layer w12: J3.1@3725,7760 3731.48,7753.52 3731.48,7718.52 3755,7695 4207.4,7695 4296.91,7605.5 4304.5,7605.5 U1.1@4332.4,7577.6
pads on no net: Qbuck.1 Qbuck.2 Qbuck.7 Qbuck.8 S5V.1 SBAT.1 U1.3 U1.18 U1.19 U1.20 U1.28 U1.29 U2.1 U2.2 U2.3 U2.4 U2.5 U2.6 U2.7 U2.8 U2.11 U2.14 U2.19 U2.20 U2.22 U2.24 U2.25 U2.26 U2.27 U2.28 U3.5
copper on no net: | length 0.5
  Top Layer w12: 4335,6445 4335.38,6444.62
  other v1: 3625,5895 3625,5975 3625,6055 3625,6130

## Polygon pours and split planes (outlines as drawn)
5V on Top Layer "5V_L01_P021" (solid, pour order 21): 4370,6115 4620,6115 4620,6655 4730,6655 4730,6015 4370,6015
5V on Top Layer "5V_L01_P022" (solid, pour order 22): 4980,6655 4980,6545 4715,6545 4715,6655
5V on Top Layer "5V_L01_P018" (solid, pour order 18): 3696.97,6115 4400,6115 4400,6015 3696.97,6015
HV_Conv_In on Top Layer "HV_CONV_IN_L01_P017" (solid, pour order 17): 3430,5120 3430,5345 3875,5345 3875,5120
5V on Top Layer "Top Layer-5V" (solid, pour order 11): 4015,6575 4015,6385 4055,6385 4055,6575 4155,6575 4155,6845 4115,6845 4110,6685 3295,6685 2825,6685 2820,6685 2820,6305 3150,6305 3150,6575 3295,6575 3295,6130 3385,6130 3585,6130 3585,5765 3440,5765 3440,5595 3585,5595 3710,5595 3710,6245 3387.5,6245 3385,6245 3385,6575
HV_Conv_In on Top Layer "HV_CONV_IN_L01_P015" (solid, pour order 15): 3239.84,5160 3875,5160 3875,4625 3234.15,4625
GND on Top Layer "Top Layer-GND" (solid, pour order 13): 3435,5785 3565,5785 3565,6110 3270,6110 3270,6555 3170,6555 3170,5980 2710,5980 2710,5890 3215,5890 3215,5912.43 3270,5939.83 3270,6055 3490,6055 3490,5865 3435,5865
7.4V on Top Layer "7.4V_L01_P003" (solid, pour order 3): 2620,5605 2845,5605 2845,5820 3210,5820 3210,5755 2900,5755 2900,5495 2620,5495
7.4V on Top Layer "7.4V_L01_P004" (solid, pour order 4): 3145,5805 3145,5845 3210,5845 3210,5805
no net on Top Layer "NONET_L01_P000" (solid, pour order 0): 2705,5985
GND on Bottom Layer "GND_L02_P023" (solid, pour order 23): 2622.42,7805 5545,7805 5545,3760 2627.41,3760
no net on Bottom Layer "NONET_L02_P014" (solid, pour order 14): 3235,5145

## Keep-outs
Keep-Out Layer:
  the board outline again, w15

## Silkscreen, mask and mechanical layers (free items; w line width, h text height)
Top Overlay:
  lines w15: 3580,3710 3580,4995 5600,4995 5600,7793.53
  text "MISO" at 2935,7665 h30
  text "MOSI" at 3075,7665 h30
  text "D9" at 3200,7665 h30
  text "D8" at 3300,7665 h30
  text "D7" at 3405,7665 h30
  text "D6" at 3500,7665 h30
  text "RX" at 3600,7665 h30
  text "TX" at 3750,7665 h30
  text "GND" at 2965,6675 h30
  text "SCK" at 3075,6675 h30
  text "A0" at 3190,6675 h30
  text "A2" at 3390,6675 h30
  text "A3" at 3490,6675 h30
  text "SDA" at 3580,6675 h30
  text "SCL" at 3690,6650 h30
  text "GND" at 2570,5970 h30 r270
  text "7.4V" at 2570,5825 h30 r270

## Text inside footprints (layer, text, board x,y; h text height)
OC_0L+: Top Overlay "4" at 6632.91,4536.5 h60 r90; Top Overlay "3" at 6310.08,4532.56 h60 r90; Top Overlay "6" at 6635,5035 h60 r90; Top Overlay "5" at 6310,5040 h60 r90; Top Overlay "2" at 6625,5435 h60 r90; Top Overlay "1" at 6310.08,5449.88 h60 r90
OC_0L-: Top Overlay "4" at 6626.5,3992.09 h60; Top Overlay "3" at 6622.56,4314.92 h60; Top Overlay "6" at 7125,3990 h60; Top Overlay "5" at 7130,4315 h60; Top Overlay "2" at 7525,4000 h60; Top Overlay "1" at 7539.88,4314.92 h60
OC_1L+: Top Overlay "4" at 6482.91,6461.5 h60 r90; Top Overlay "3" at 6160.08,6457.56 h60 r90; Top Overlay "6" at 6485,6960 h60 r90; Top Overlay "5" at 6160,6965 h60 r90; Top Overlay "2" at 6475,7360 h60 r90; Top Overlay "1" at 6160.08,7374.88 h60 r90
OC_1L-: Top Overlay "1" at 7529.88,6394.92 h60; Top Overlay "2" at 7515,6080 h60; Top Overlay "5" at 7120,6395 h60; Top Overlay "6" at 7115,6070 h60; Top Overlay "3" at 6612.56,6394.92 h60; Top Overlay "4" at 6616.5,6072.09 h60
S5V: Top Overlay "0" at 2760,4870 h40 r90; Top Overlay "1" at 2760,5205 h40 r90
SBAT: Top Overlay "0" at 2760,5265 h40 r90; Top Overlay "1" at 2760,5600 h40 r90